# EAGLE board Mine Robo ( (EAGLE 9.7.0)

Size 209.07 x 110.84 mm. Coordinates in mm from the lower left corner, seen from the top.
Outline: 0,0 209.07,0 209.07,110.84 0,110.84 0,0
Copper layers (1*16): Top 0.035mm / dielectric 1.5mm / Bottom 0.035mm
Design rules "default": minimum track width 6mil, minimum drill 0.35mm, track to track 6mil, track to pad 6mil, pad to pad 6mil, via to via 6mil, smd to smd 6mil, copper to edge 40mil, drill to drill 6mil, minimum pad ring 10mil, minimum via ring 8mil, stop-mask expansion 4mil, vias tented up to drill 0mil, thermal gap 10mil

## Footprints (pad centres in the part's own frame; a part is rotated, then mirrored left to right if it is on the bottom)
BATTERY-GENERIC = drill 1.118 pad 3.15 octagon: + 2.54,0; - -2.54,0
LEDRD254W60D565H860B = drill 0.981 pad 1.581: 1 -1.27,0; 2 1.27,0
HC-SR04 = drill 1.016 long: 1 -3.81,0; 2 -1.27,0; 3 1.27,0; 4 3.81,0
MOTOR = drill 1.118 pad 3.15 octagon: + 2.54,0; - -2.54,0
RESAD1016W63L850D250B = drill 0.83 pad 1.43: 1 -5.08,0; 2 5.08,0
DIP762W53P254L1969H508Q16B = drill 0.743 pad 1.343: 1 -3.81,8.89; 2 -3.81,6.35; 3 -3.81,3.81; 4 -3.81,1.27; 5 -3.81,-1.27; 6 -3.81,-3.81; 7 -3.81,-6.35; 8 -3.81,-8.89; 9 3.81,-8.89; 10 3.81,-6.35; 11 3.81,-3.81; 12 3.81,-1.27; 13 3.81,1.27; 14 3.81,3.81; 15 3.81,6.35; 16 3.81,8.89
ARDUINO-UNO-R3-SHIELD = drill 1.016 pad 1.88: 3.3V 24.13,-2.54; 5V 24.13,0; A0 24.13,12.7; A1 24.13,15.24; A2 24.13,17.78; A3 24.13,20.32; A4 24.13,22.86; A5 24.13,25.4; AREF -24.13,-13.97; D2 -24.13,20.32; D3 -24.13,17.78; D4 -24.13,15.24; D5 -24.13,12.7; D6 -24.13,10.16; D7 -24.13,7.62; D8 -24.13,3.81; D9 -24.13,1.27; D10 -24.13,-1.27; D11 -24.13,-3.81; D12 -24.13,-6.35; D13 -24.13,-8.89; GND@0 24.13,2.54; GND@1 24.13,5.08; GND@2 -24.13,-11.43; IOREF 24.13,-7.62; NC 24.13,-10.16; RES 24.13,-5.08; RX -24.13,25.4; SCL -24.13,-19.05; SDA -24.13,-16.51; TX -24.13,22.86; VIN 24.13,7.62
TSOP48 = drill 0.8: 1 -2.54,0; 2 0,0; 3 2.54,0

## Placement (x,y rotation side)
BAT1  9V  [BATTERY-GENERIC]  200.81,71.89 180 top
D1  RED  [LEDRD254W60D565H860B]  103.66,102.93 180 top
DIST1  DISTANCE-SENSOR-4PINHC-SR04  [HC-SR04]  41.92,85.18 0 top
M1  MOTOR_HDR  [MOTOR]  140.49,82.8 0 top
M3  MOTOR_HDR  [MOTOR]  142.11,8.26 180 top
R1  1k  [RESAD1016W63L850D250B]  104.93,97.85 90 top
U1  L293E  [DIP762W53P254L1969H508Q16B]  142.22,40.66 90 top
U1RASPUTIO  ARDUINO-UNO-R3-SHIELD  [ARDUINO-UNO-R3-SHIELD]  47.88,43.36 270 top
U2  IR-RECEIVERTSOP48  [TSOP48]  120.63,34.31 0 top

## Library data of the parts
BAT1 DIST1 M1 M3 R1 U1 U1RASPUTIO U2 = Tinkercad
D1 = Tinkercad; CATEGORY: Opto-Electronic; SUB-CATEGORY: LED; VALUE: LED_RED

## Nets
BAT1+: BAT1.+ U1.8
BAT1-: BAT1.- DIST1.4 R1.1 U1.4 U1.5 U1.12 U1.13 U1RASPUTIO.GND@0 U1RASPUTIO.GND@1 U1RASPUTIO.GND@2 U2.2
D1_A: D1.1 R1.2
M1_+: M1.+ U1.11
M1_-: M1.- U1.14
M3_+: M3.+ U1.3
M3_-: M3.- U1.6
U1RASPUTIO_5V: DIST1.1 U1.1 U1.9 U1.16 U1RASPUTIO.5V U2.3
U1RASPUTIO_D3: U1.7 U1RASPUTIO.D3
U1RASPUTIO_D4: U1.2 U1RASPUTIO.D4
U1RASPUTIO_D5: U1.15 U1RASPUTIO.D5
U1RASPUTIO_D6: U1.10 U1RASPUTIO.D6
U1RASPUTIO_D9: U1RASPUTIO.D9 U2.1
U1RASPUTIO_D10: D1.2 U1RASPUTIO.D10
U1RASPUTIO_D12: DIST1.3 U1RASPUTIO.D12
U1RASPUTIO_D13: DIST1.2 U1RASPUTIO.D13

## Tracks (layer width: path | path; a pad name or v marks a point on that pad's centre or on a via)
BAT1+  (1 unrouted)
BAT1-  (10 unrouted)
D1_A  (1 unrouted)
M1_+  (1 unrouted)
M1_-  (1 unrouted)
M3_+  (1 unrouted)
M3_-  (1 unrouted)
U1RASPUTIO_5V  (5 unrouted)
U1RASPUTIO_D3  (1 unrouted)
U1RASPUTIO_D4  (1 unrouted)
U1RASPUTIO_D5  (1 unrouted)
U1RASPUTIO_D6  (1 unrouted)
U1RASPUTIO_D9  (1 unrouted)
U1RASPUTIO_D10  (1 unrouted)
U1RASPUTIO_D12  (1 unrouted)
U1RASPUTIO_D13  (1 unrouted)